# Altium PCB PCB1.PcbDoc
Units mil, origin at the board's own origin, x right, y up, seen from the top; angles counter-clockwise.
Board outline 2385 x 2130 mil, 2 copper layers (Top Layer, Bottom Layer); 41 components, 32 nets, 169 pads, 31 vias.
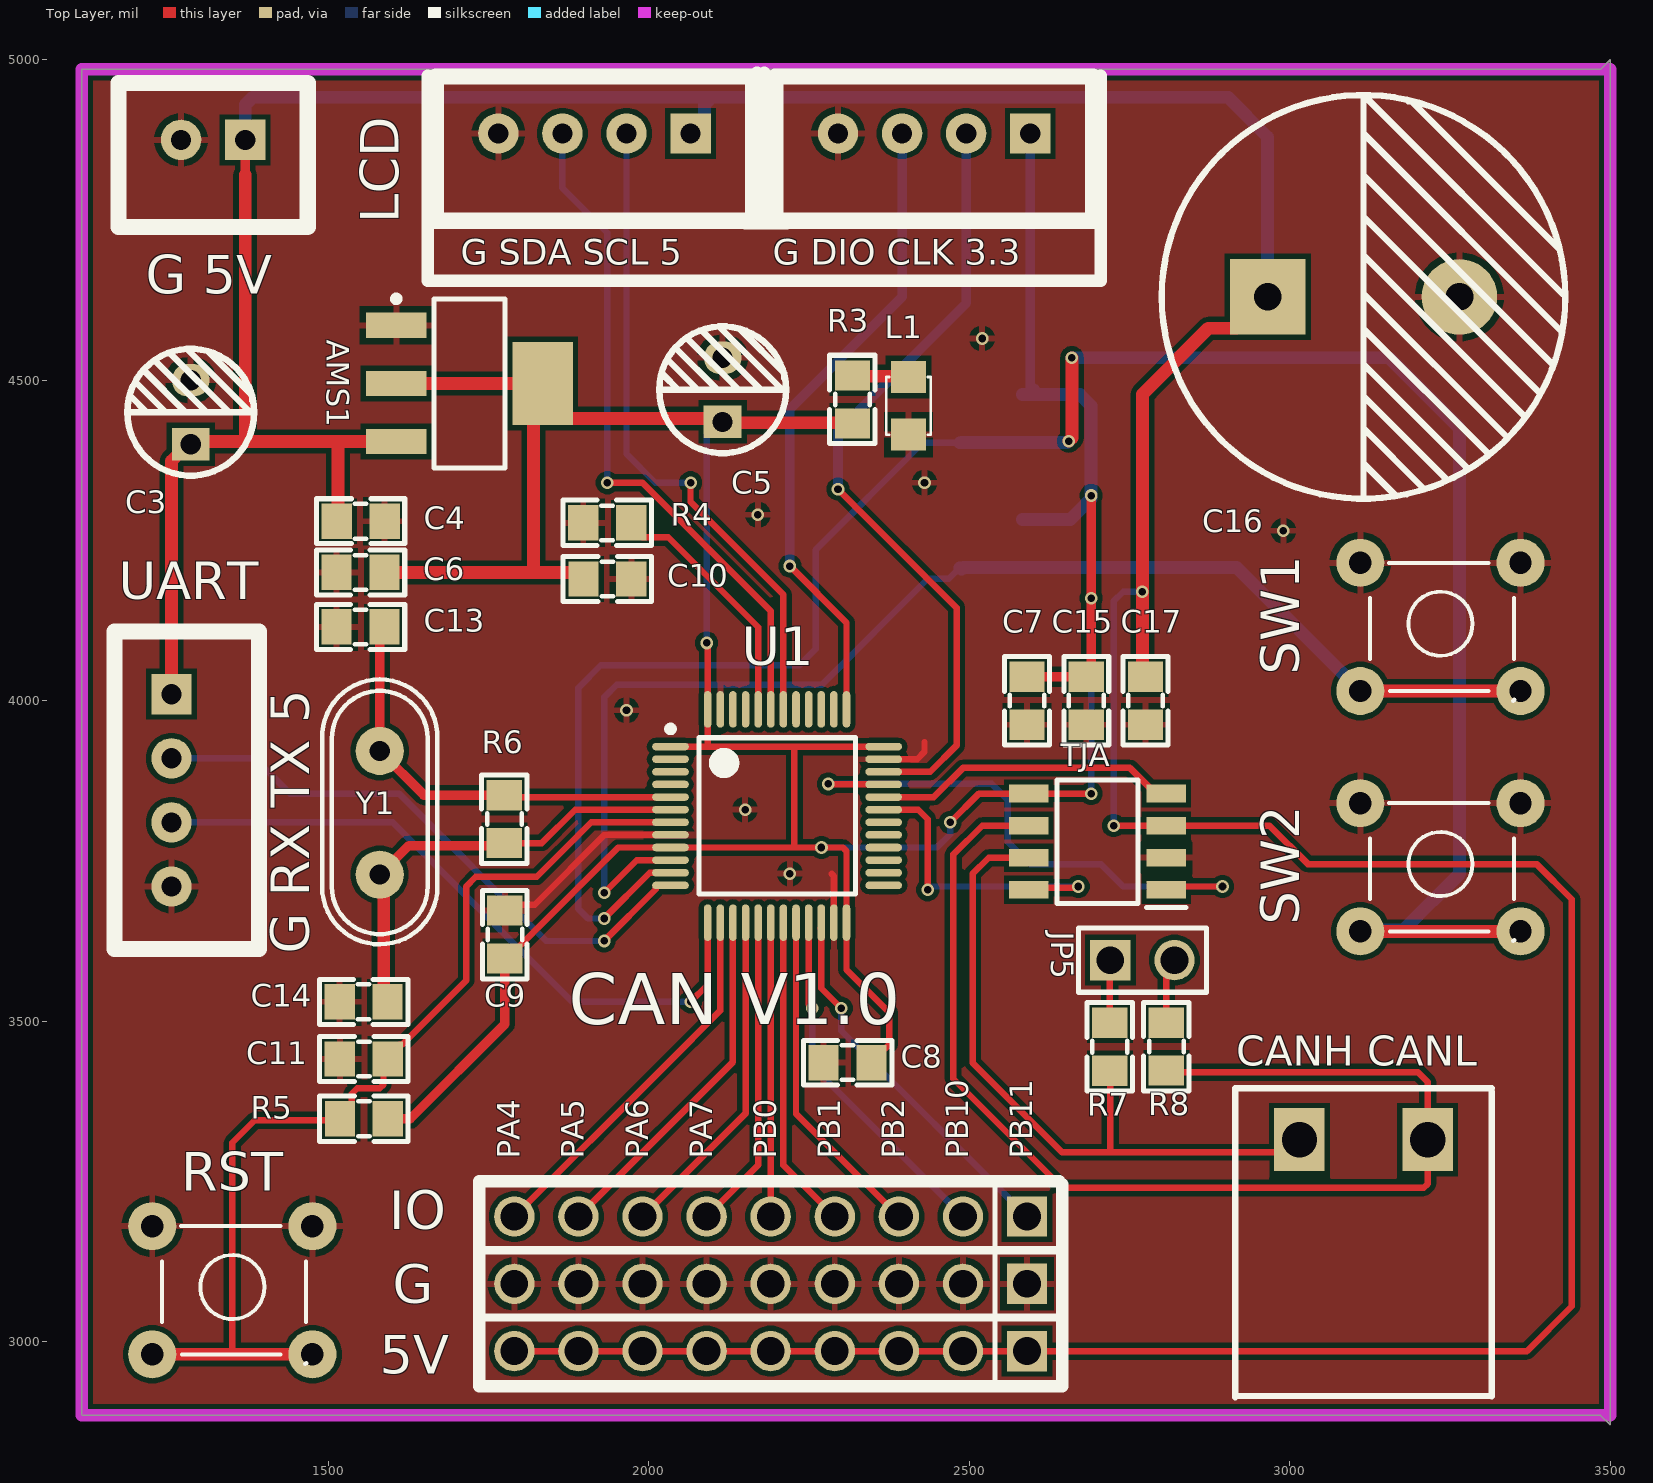
[diagram p0: Top Layer view]
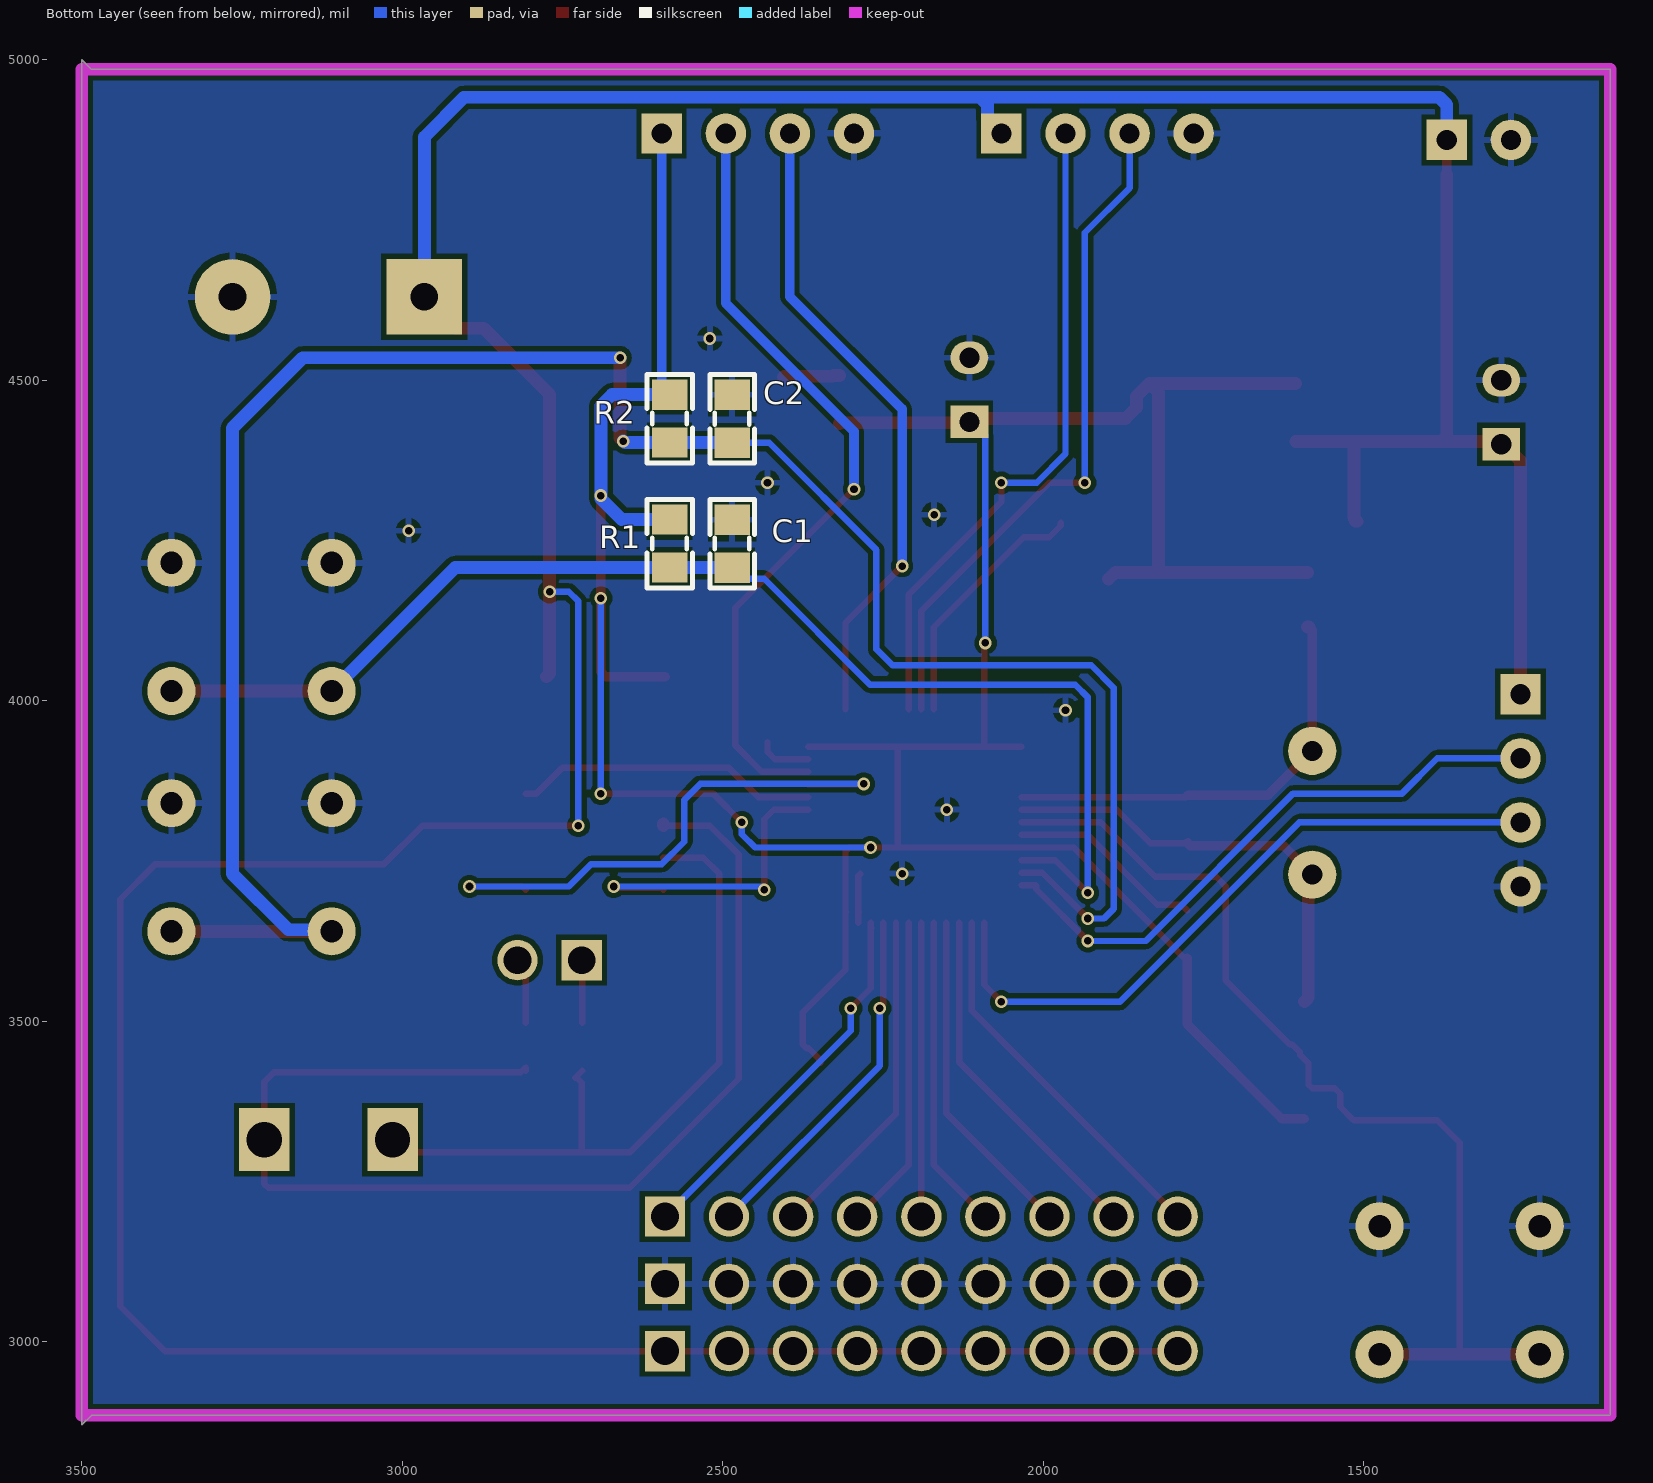
[diagram p1: Bottom Layer view, seen from below]

## Layer stack, top to bottom
Top Solder: solder mask 0.4, Solder Resist, Dk 3.5
Top Layer: signal copper 1.4
Dielectric 1: dielectric 12.6, FR-4, Dk 4.8
Bottom Layer: signal copper 1.4
Bottom Solder: solder mask 0.4, Solder Resist, Dk 3.5

## Board outline
1115,2885 3485,2885 3500,2870 3500,5000 3485,4985 1115,4985

## Design rules (kind name [scope] priority, off if disabled: settings)
Clearance [All] p1: gap=7.87 ignorepadtopadclearanceinfootprint=FALSE
PolygonConnect [All] p1: connectstyle=Relief reliefconductorwidth=10 reliefentries=4 polygonreliefangle="90 Angle" airgapwidth=10
RoutingVias [All] p1: holewidth=11.81 width=19.68 viastyle="Through Hole" minholewidth=11.81 minwidth=19.68 maxholewidth=11.81 maxwidth=19.68
SolderMaskExpansion [All] p1: expansion=4 istentingtop=FALSE
Width [All] p1: maxlimit=20 minlimit=10 preferedwidth=15
30 further rules are at their usual default settings.

## Components (designator, comment, footprint, x,y, rotation, side; value= is the part's Value field where it differs from the comment)
5V "JP 1x9 2.54" "JP 1x9 DT" 2590,2985 r180 top (schematic designator JP3)
AMS1 "AMS1117-3.3V" SOT223 1720,4495 r270 top value="AMS1117-3.3V SOT223"
C1 "104" "tu 0805" 2485,4245 r270 bottom
C2 "104" "tu 0805" 2485,4440 r270 bottom
C3 "100uF" "tu hoa 5mm" 1285,4450 r90 top
C4 "104" "tu 0805" 1550,4280 r0 top
C5 "100uF" "tu hoa 5mm" 2115,4485 r90 top
C6 "104" "tu 0805" 1550,4200 r180 top
C7 "104" "tu 0805" 2590,4000 r270 top
C8 "104" "tu 0805" 2310,3435 r180 top
C9 "104" "tu 0805" 1775,3635 r90 top
C10 "104" "tu 0805" 1935,4190 r0 top
C11 "104" "tu 0805" 1555,3441 r0 top
C13 "20pF" "tu 0805" 1550,4115 r180 top
C14 "20pF" "tu 0805" 1555,3530 r180 top
C15 "104" "tu 0805" 2682.5,4000 r270 top
C16 "220uF" "tu hoa 16mm" 3115,4630 r180 top
C17 "104" "tu 0805" 2775,4000 r270 top
"CANH CANL" "CON 2 EDG5.08" "CON 2 2EDG5.08" 3215,3315 r180 top (schematic designator P1)
G "JP 1x9 2.54" "JP 1x9 DT" 2590,3090 r180 top (schematic designator JP2)
"G 5V" "Header 2P 2.54 Duc Thang" XH2.54M-2 1370,4875 r180 top (schematic designator H1)
"G DIO CLK 3.3" "Header 4P 2.54 Duc Thang" XH2.54M-4 2595,4885 r180 top (schematic designator H3)
"G SDA SCL 5" "Header 4P 2.54 Duc Thang" XH2.54M-4 2065,4885 r180 top (schematic designator H2)
IO "JP 1x9 2.54" "JP 1x9 DT" 2590,3195 r180 top (schematic designator JP1)
JP5 "JP 1x2 2.54" "JP 1x2 DT" 2720,3595 r0 top
L1 "LED 0805" LED-0805-Red 2405,4505 r270 top
R1 "10k" "tro smd 0805" 2585,4244.9 r90 bottom
R2 "10k" "tro smd 0805" 2585,4439.9 r90 bottom
R3 "330" "tro smd 0805" 2320,4470 r270 top
R4 "10k" "tro smd 0805" 1935.1,4275 r180 top
R5 "10k" "tro smd 0805" 1555.1,3350 r0 top
R6 "1M" "tro smd 0805" 1772,3815 r90 top
R7 "60" "tro smd 0805" 2721.5,3460.1 r270 top
R8 "60" "tro smd 0805" 2805,3460 r90 top
RST "SW" SW2-DIP 1225,3180 r0 top value="Button chip 4 pin" (schematic designator SW3)
SW1 "SW" SW2-DIP 3110,4215 r0 top value="Button chip 4 pin"
SW2 "SW" SW2-DIP 3110,3840 r0 top value="Button chip 4 pin"
TJA "TJA1051T_3_118" SOIC127P600X175-8N 2700,3780 r180 top (schematic designator B1)
U1 "STM32F103xx_LQFP48" STM32_LQPF48 2200,3820 r0 top
UART "Header 4P 2.54 Duc Thang" XH2.54M-4 1255,4010 r270 top (schematic designator H4)
Y1 "16Mhz" "Thach Anh 2 chan cam" 1580,3825 r270 top value=4Mhz

## Footprints (in the part's own frame and the unit in brackets; to place one, negate y for a bottom-side part, rotate by r counter-clockwise, add the part's x,y. Pads: shape width x height; smd on the part's side, far side on the other; paste and mask are expansions set on the pad)
"CON 2 2EDG5.08" [mm]
  rect 2x2.5 hole 1.4: 1(0,0) 2(5.08,0)
  silkscreen extent -2.54,-2.03 7.62,10.21, body extent -2.5,-1.75 7.58,10.25, height 3.15
"JP 1x2 DT" [mm] "2 pins, 1 row, straight, gold plating"
  rect 1.6x1.6 hole 1.1: 1(0,0)
  round 1.6 hole 1.1: 2(2.54,0)
  silkscreen extent -1.27,-1.27 3.81,1.27, body extent -1.27,-1.27 3.81,1.27, height 8.54
"JP 1x9 DT" [mm] "9 pins, 1 row, straight, gold plating"
  rect 1.6x1.6 hole 1.1: 1(0,0)
  round 1.6 hole 1.1: 2(2.54,0) 3(5.08,0) 4(7.62,0) 5(10.16,0) 6(12.7,0) 7(15.24,0) 8(17.78,0) 9(20.32,0)
  silkscreen extent -1.27,-1.27 21.59,1.27, body extent -1.27,-1.27 21.59,1.27, height 8.54
LED-0805-Red [mil]
  rect 50x55 smd: 1(0,0) 2(90,0)
  silkscreen extent 0,-35 90,35, body extent 5,-25 85,25, height 43
SOIC127P600X175-8N [mm]
  rect 1.55x0.7 smd: 1(-2.725,1.905) 2(-2.725,0.635) 3(-2.725,-0.635) 4(-2.725,-1.905) 5(2.725,-1.905) 6(2.725,-0.635) 7(2.725,0.635) 8(2.725,1.905)
  silkscreen extent -3.5,-2.45 1.6,2.61, body extent -3,-2.45 3,2.45, height 1.75
SOT223 [mm]
  rect 1x2.4 smd: 1(-2.3,-2.9) 2(0,-2.9) 3(2.3,-2.9)
  rect 3.3x2.4 smd: 4(0,2.9)
  silkscreen extent -3.47,-3.02 3.35,1.4, body extent -3.25,-3.56 3.25,3.4, height 1.68
STM32_LQPF48 [mm]
  oval 1.45x0.3 smd: 1(-4.225,2.75) 2(-4.225,2.25) 3(-4.225,1.75) 4(-4.225,1.25) 5(-4.225,0.75) 6(-4.225,0.25) 7(-4.225,-0.25) 8(-4.225,-0.75) 9(-4.225,-1.25) 10(-4.225,-1.75) 11(-4.225,-2.25) 12(-4.225,-2.75) 25(4.225,-2.75) 26(4.225,-2.25) 27(4.225,-1.75) 28(4.225,-1.25) 29(4.225,-0.75) 30(4.225,-0.25) 31(4.225,0.25) 32(4.225,0.75) 33(4.225,1.25) 34(4.225,1.75) 35(4.225,2.25) 36(4.225,2.75)
  oval 0.3x1.45 smd: 13(-2.75,-4.225) 14(-2.25,-4.225) 15(-1.75,-4.225) 16(-1.25,-4.225) 17(-0.75,-4.225) 18(-0.25,-4.225) 19(0.25,-4.225) 20(0.75,-4.225) 21(1.25,-4.225) 22(1.75,-4.225) 23(2.25,-4.225) 24(2.75,-4.225) 37(2.75,4.225) 38(2.25,4.225) 39(1.75,4.225) 40(1.25,4.225) 41(0.75,4.225) 42(0.25,4.225) 43(-0.25,4.225) 44(-0.75,4.225) 45(-1.25,4.225) 46(-1.75,4.225) 47(-2.25,4.225) 48(-2.75,4.225)
  silkscreen extent -4.35,-3.1 3.1,3.57, body extent -4.5,-4.5 4.5,4.5, height 1.6
SW2-DIP [mil] "SW button 4pin, 250 x250 mil"
  round 75 hole 35: 1(0,0) 2(0,-200) 3(250,-200) 4(250,0)
  silkscreen extent 15,-215 240,0, body extent -36,-220 276,24, height 276
"Thach Anh 2 chan cam" [mm]
  round 1.905 hole 0.8: 1(-2.45,0) 2(2.45,0)
  silkscreen extent -5.28,-2.29 5.21,2.29, body extent -5.68,-2.36 5.68,2.29, height 3.5
"tro smd 0805" [mm]
  rect 1.2x1.4 smd: 1(-0.946,-0.061) 2(0.954,-0.061)
  silkscreen extent -1.75,-0.97 1.75,0.84, body extent -1.56,-0.76 1.44,0.64, height 0.53
"tu 0805" [mm] "Compoment SMD 80x50mil"
  rect 1.2x1.4 smd: 1(-0.946,-0.003) 2(0.954,-0.003)
  silkscreen extent -1.75,-0.89 1.75,0.89, body extent -1.01,-0.64 1.01,0.63, height 0.61
"tu hoa 5mm" [mm]
  rect 1.3x1.5 hole 0.8: 1(-1.27,0)
  oval 1.3x1.5 hole 0.8: 2(1.27,0)
  silkscreen extent -2.51,-2.51 2.51,2.51, body extent -3.12,-3.18 3.23,3.18, height 14.55
"tu hoa 16mm" [mm]
  rect 3x3 hole 1.1: 1(3.8,0)
  round 3 hole 1.1: 2(-3.8,0)
  silkscreen extent -8,-8 8,8, body extent -8.25,-8.25 8.25,8.25, height 28.91
XH2.54M-2 [mm]
  rect 1.6x1.6 hole 0.8: 1(0,0)
  round 1.6 hole 0.8: 2(2.54,0)
  silkscreen extent -2.48,-2.26 5.02,3.46, body extent -2.48,-2.26 5.02,3.48, height 6.91
XH2.54M-4 [mm]
  rect 1.6x1.6 hole 0.8: 1(0,0)
  round 1.6 hole 0.8: 2(2.54,0) 3(5.08,0) 4(7.62,0)
  silkscreen extent -2.48,-2.26 10.1,3.46, body extent -2.48,-2.26 10.1,3.48, height 6.91

## Part data
5V G IO: library part "JP 1x9 2.54 Duc Thang", "Cắm", Chung_Loai=Cắm, Don_Vi=Con, Ma_Hang=MH000903, Ten_Linh_Kien="Jump Đơn Đực 2.54MM 1x40P Thẳng 11MM"
AMS1: library part "AMS1117 SMD", "Dán", Chung_Loai=Dán, Don_Vi=Con, Ma_Hang=MH000596
C1 C2 C4 C6 C7 C8 C9 C10 C11 C13 C14 C15 C17: library part "Tu 0805 104 50V 10%", "Dán", Chung_Loai=Dán, Don_Vi=Con, Ma_Hang=MH004551, So_Chan=2, Ten_Linh_Kien="Tụ 0805 104-100nF 10% 50V"
C3 C5: library part "Tu Hoa 100uF 16V 5x7", "Cắm", Chung_Loai=Cắm, Don_Vi=Con, Ma_Hang=MH001347, So_Chan=2, Ten_Linh_Kien="Tụ Hóa 100uF 16V 5x7MM"
C16: library part "Tu Hoa 220uF 200V 15x35", "Cắm", Chung_Loai=Cắm, Don_Vi=Con, Ma_Hang=MH004819, So_Chan=2, Ten_Linh_Kien="Tụ Hóa 220uF 200V 15x35MM"
"CANH CANL" "G 5V" "G DIO CLK 3.3" "G SDA SCL 5" UART: "Cắm", Chung_Loai=Cắm, Don_Vi=Con
  "CANH CANL": Ma_Hang=MH000759, Ten_Linh_Kien="CON 2 2EDG5.08-2P 5.08MM ( Xanh Cong)"
  "G 5V": Ma_Hang=MH001283, Ten_Linh_Kien="Header 2P XH2.54-2P Đực Thẳng"
  "G DIO CLK 3.3" "G SDA SCL 5" UART: Ma_Hang=MH001285, Ten_Linh_Kien="Header 4P XH2.54-4P Đực Thẳng"
JP5: library part "JP 1x2 2.54 Duc Thang", "Cắm", Chung_Loai=Cắm, Don_Vi=Con, Ma_Hang=MH000903, Ten_Linh_Kien="Jump Đơn Đực 2.54MM 1x40P Thẳng 11MM"
L1: library part "LED 0805 Do", "Dán", Chung_Loai=Dán, Don_Vi=Con, Ma_Hang=MH000897, Ten_Linh_Kien="LED 0805 Màu Đỏ (Red)"
R1 R2 R3 R4 R5 R6 R7 R8: library part "Tro 0805 1% 18k", "Dán", Chung_Loai=Dán, Don_Vi=Con, Ma_Hang=MH005477, So_Chan=2, Ten_Linh_Kien="Trở 0805 1% 18k"
RST SW1 SW2: library part SW4, "Switch button 4 pin"
TJA: "CAN Interface IC Hi Spd CAN Transcvr 4.5V-5.5V 250ns", Manufacturer_Name=NXP, Manufacturer_Part_Number=TJA1051T/3,118, Mouser Part Number=771-TJA1051T3118, Datasheet Link=http://www.nxp.com/docs/en/data-sheet/TJA1051.pdf, Geometry.Height=1.75mm, Mouser Price/Stock=https://www.mouser.co.uk/ProductDetail/NXP-Semiconductors/TJA1051T-3118?qs=O%2F7ihdSJpebv1PFlp05wnQ%3D%3D
Y1: library part "Thach Anh 2 chan Cam", "Crystal For all Crystal 2pin."
U1: ComponentLink1Description="Manufacturer Link", ComponentLink1URL=www.st.com/stm32, ComponentLink2Description=Datasheet, ComponentLink2URL=http://www.st.com/stonline/products/literature/ds/13587.pdf, DatasheetVersion="rev6, Mar-2008", PackageDescription="48-Pin Low-Profile Quad Flat Pack, 7 x 7 mm Body, 0.5 mm Pitch (LQFP48)", PackageReference=LQFP48, PackageVersion=Mar-2008, Published=30-May-2008, Publisher="Altium Limited"

## Via types
v1: diameter 19.68, hole 11.81, Top Layer to Bottom Layer, 31 vias

## Nets (pads, with @x,y where several pads share a name; then routed paths per layer and width w, separated by ;. In a path a pad name is that pad's centre, name@x,y a point inside that pad or via, vN(x,y) a via of type N, cw(c..) or ccw(c..) an arc to the next point about the centre after c; other vN are vias at no path point)
+3.3: "G DIO CLK 3.3.1" AMS1.2 AMS1.4 C5.1 C6.1 C7.1 C8.1 C9.1 C10.1 C15.1 R1.2 R2.2 R3.2 R5.2 TJA.5 U1.1 U1.9 U1.24 U1.36 U1.48 | length 5691.6
  Top Layer w10: C9.1 1779.07,3597.77 1797.69,3616.39 1952.09,3770.79 U1.9 2226.54,3770.79 ; U1.1 2095,3928.27 ; v1(2090,4090) 2091.73,4088.27 U1.48 2091.73,3931.54 2095,3928.27 ; C8.1 2347.23,3439.07 2365.85,3457.69 2369.14,3457.69 2375,3463.55 2375,3513.46 2308.27,3580.2 U1.24 2308.27,3669.16 2307.43,3670 2308.27,3670.84 2308.27,3765 2302.48,3770.79 v1(2269.21,3770.79) 2226.54,3770.79 ; U1.36 2226.54,3928.27 ; v1(2470,3810) 2515,3855 TJA.5 v1(2690,3855) ; 2095,3928.27 2226.54,3928.27 ; 2226.54,3770.79 2226.54,3928.27
  Top Layer w15: R5.2 1627.61,3347.61 1775.13,3495.13 C9.1 ; 2575,4865 2595,4885 ; C7.1 C15.1 2690,4044.86 v1(2690,4160) v1(2690,4320)
  Top Layer w20: C6.1 1826.58,4200.13 ; AMS1.2 AMS1.4 ; C10.1 1887.5,4200.13 1826.58,4200.13 ; R3.2 2316.32,4433.71 2116.29,4433.71 C5.1 2109.96,4440.04 1871.42,4440.04 1854.17,4457.28 1854.17,4475 AMS1.4 ; 1826.58,4200.13 1820,4206.72 1820,4480.83 AMS1.4
  Bottom Layer w10: v1(2090,4090) 2090,4405 2090.47,4405.47 2090.47,4414.41 2106.06,4430 2115,4430 C5.1 ; v1(2269.21,3770.79) 2449.21,3770.79 2470,3791.57 v1(2470,3810) ; v1(2690,3855) v1(2690,4160)
  Bottom Layer w15: R2.2@2590.08,4474.91 2592.64,4477.47 2595,4479.83 2595,4885
  Bottom Layer w20: R1.2 2657.47,4282.47 2690,4315 v1(2690,4320) 2690,4460 2672.53,4477.47 R2.2@2600.17,4477.47 ; R2.2 2592.64,4477.47 R2.2@2600.17,4477.47 ; R2.2@2595,4479.83 2600.17,4485 R2.2@2600.17,4477.47
+5: 5V.1 5V.2 5V.3 5V.4 5V.5 5V.6 5V.7 5V.8 5V.9 "G 5V.1" "G SDA SCL 5.1" AMS1.3 C3.1 C4.1 C16.1 C17.1 TJA.3 UART.1 | length 7522.4
  Top Layer w10: 5V.9 5V.8 5V.7 5V.6 5V.5 5V.4 5V.3 5V.2 5V.1 3370,2985 3440,3055 3440,3690 3385,3745 3028.26,3745 2968.26,3805 TJA.3 v1(2725,3805)
  Top Layer w15: 1370,4820 1370,4875
  Top Layer w20: UART.1 1255,4373.94 1281.06,4400 C3.1 1289.45,4404.45 1370,4404.45 1378.84,4404.45 ; 1370,4820 1370,4413.28 1373.28,4410 1378.84,4404.45 ; C4.1 1510.13,4279.87 1515,4284.73 1515,4404.45 ; AMS1.3 1515,4404.45 ; C17.1 2770,4042.09 v1(2770,4170) 2770,4478.15 2781.72,4489.87 2872.79,4580.94 2916.34,4580.94 2955,4619.61 2955,4630 C16.1 ; 1378.84,4404.45 1515,4404.45
  Bottom Layer w10: v1(2725,3805) 2725,4155 2740,4170 v1(2770,4170)
  Bottom Layer w20: 1370,4875 1370,4929.78 1381.72,4941.5 2098.21,4941.5 ; 2065,4885 2065,4895 2075,4895 2086.5,4906.5 2086.5,4929.78 2098.21,4941.5 ; C16.1 2965.39,4879.61 2903.5,4941.5 2098.21,4941.5
BT1: C1.2 R1.1 SW1.2 SW1.3 U1.10 | length 2032.6
  Top Layer w10: v1@1930.07,3700.07 1981.1,3751.1 U1.10
  Top Layer w20: SW1.2@3105,4010 SW1.2 SW1.3
  Bottom Layer w10: v1(1930,3700) 1930,4005 1950,4025 2270,4025 2435.08,4190.08 2467.79,4190.08 C1.2
  Bottom Layer w20: C1.2 2487.56,4205 2490.11,4207.55 2582.48,4207.55 R1.1 2917.33,4207.67 SW1.2
BT2: C2.2 R2.1 SW2.2 SW2.3 U1.11 | length 3464.6
  Top Layer w10: v1(1930,3660) 2001.42,3731.42 U1.11
  Top Layer w20: v1(2655,4405) 2660,4410 v1(2660,4535) ; SW2.2 SW2.3
  Bottom Layer w10: v1(1930,3660) 1905,3660 1890,3675 1890,4020 1925,4055 2235,4055 2260,4080 2260,4235 2427.43,4402.43 C2.2
  Bottom Layer w20: C2.2 2487.57,4402.43 2487.7,4402.55 2652.55,4402.55 v1(2655,4405) ; v1(2660,4535) 3155,4535 3265,4425 3265,3730 3177.5,3642.5 3112.5,3642.5 3110,3645 SW2.2
CAN_H: JP5.1 R7.1 | length 101.4
  Top Layer w10: JP5.1@2710,3595 2719.11,3585.89 R7.1
CAN_L: JP5.2 R8.2 | length 102.6
  Top Layer w10: R8.2 2807.39,3568.05 2820,3580.66 JP5.2
CAN_RX: TJA.4 U1.32 | length 476.3
  Top Layer w10: U1.32 2444.53,3849.53 2490,3895 2750.55,3895 2790.55,3855 TJA.4
CAN_TX: TJA.1 U1.33 | length 895.5
  Top Layer w10: v1@2280,3869.21 U1.33 ; TJA.1 2812.28,3710 v1(2895,3710)
  Bottom Layer w10: v1(2280,3870) 2535,3870 2560,3845 2560,3780 2595,3745 2705,3745 2740,3710 v1(2895,3710)
CANH: "CANH CANL.2" R7.2 TJA.7 | length 1109.2
  Top Layer w10: TJA.7 2530,3755 2505,3730 2505,3435 2645,3295 2720,3295 ; R7.2 2730,3411.63 2727.73,3411.63 2720,3403.91 2720,3295 ; 3016.65,3316.65 2995,3295 2720,3295
CANL: "CANH CANL.1" R8.1 TJA.6 | length 1883.4
  Top Layer w10: TJA.6@2592.72,3807.28 2590.43,3805 2520,3805 2475,3760 2475,3410 2645,3240 3209.14,3240 3215,3245.86 3215,3315 3215,3405 3200,3420 2815,3420 2807.39,3427.61 R8.1
  Top Layer w20: TJA.6 TJA.6@2592.72,3807.28
GND: "G 5V.2" "G DIO CLK 3.3.4" "G SDA SCL 5.4" AMS1.1 C1.1 C2.1 C3.2 C4.2 C5.2 C6.2 C7.2 C8.2 C9.2 C10.2 C11.1 C13.2 C14.2 C15.2 C16.2 C17.2 G.1 G.2 G.3 G.4 G.5 G.6 G.7 G.8 G.9 L1.2 R4.2 RST.1 RST.4 SW1.1 SW1.4 SW2.1 SW2.4 TJA.2 U1.8 U1.23 U1.35 U1.47 UART.4 | length 469.3
  Top Layer w10: C9.2 1784.18,3681.62 1821.62,3681.62 1930.47,3790.47 U1.8 ; 2285,3730 2288.58,3726.42 2288.58,3670.84 2287.75,3670 2288.58,3669.16 U1.23 ; U1.35 2418.58,3908.58 2430,3920 2430,3935
  other v1: 2220,3730 2150,3830 1965,3985 2990,4265 2170,4290 2430,4340 2520,4565
I2C1_SCL: "G SDA SCL 5.2" U1.42 | length 1032.4
  Top Layer w10: v1(2065,4340) 2064.84,4339.84 2064.84,4310.16 2209.84,4165.16 U1.42
  Bottom Layer w10: 1965,4885 1965,4385 2010,4340 v1(2065,4340)
I2C1_SDA: "G SDA SCL 5.3" U1.43 | length 1065.6
  Top Layer w10: v1(1935,4340) 1990,4340 2190.16,4139.84 U1.43
  Bottom Layer w10: 1865,4885 1865,4800 1935,4730 v1(1935,4340)
NetH3_2: "G DIO CLK 3.3.2" U1.34 | length 1245.2
  Top Layer w10: v1(2295,4330) 2480,4145 2480,3930 2438.9,3888.9 U1.34
  Bottom Layer w15: v1(2295,4330) 2295,4420 2495,4620 2495,4885
NetH3_3: "G DIO CLK 3.3.3" U1.37 | length 1016
  Top Layer w10: v1(2220,4210) 2308.27,4121.73 U1.37
  Bottom Layer w10: 2385,4875 2395,4885
  Bottom Layer w15: v1(2220,4210) 2220,4455 2395,4630 2395,4865 2385,4875
NetJP1_1: IO.1 U1.22 | length 592.4
  Top Layer w10: U1.22 2268.9,3645.84 2268.06,3645 2268.9,3644.16 2268.9,3551.1 v1(2300,3520)
  Bottom Layer w10: v1(2300,3520) 2300,3485 IO.1
NetJP1_2: IO.2 U1.21 | length 558.4
  Top Layer w10: U1.21 2249.21,3525.79 v1(2255,3520)
  Bottom Layer w10: v1(2255,3520) 2255,3430 IO.2
NetJP1_3: IO.3 U1.20 | length 525.1
  Top Layer w10: U1.20 2229.53,3355.47 IO.3
NetJP1_4: IO.4 U1.19 | length 491.9
  Top Layer w10: U1.19 2209.84,3275.16 IO.4
NetJP1_5: IO.5 U1.18 | length 458.7
  Top Layer w10: IO.5 2190,3210 2190.08,3210.08 2190.08,3653.58 U1.18
NetJP1_6: IO.6 U1.17 | length 492
  Top Layer w10: IO.6 2170.47,3275.47 U1.17
NetJP1_7: IO.7 U1.16 | length 525.3
  Top Layer w10: IO.7 2150.79,3355.79 U1.16
NetJP1_8: IO.8 U1.15 | length 558.5
  Top Layer w10: IO.8 2131.1,3436.1 U1.15
NetJP1_9: IO.9 U1.14 | length 591.8
  Top Layer w10: IO.9 2025,3430 2111.42,3516.42 U1.14
NetL1_1: L1.1 R3.1 | length 88.3
  Top Layer w20: R3.1 2327.23,4507.23 2328.34,4506.11 2403.89,4506.11 L1.1
NetR4_1: R4.1 U1.44 | length 396.6
  Top Layer w10: R4.1 1972.33,4272.67 1990.17,4254.83 2030.17,4254.83 2170.47,4114.53 U1.44
OSC_IN: C13.1 R6.2 U1.5 Y1.1 | length 695.1
  Top Layer w10: R6.2 1777.44,3849.53 U1.5
  Top Layer w15: Y1.1@1566.46,3921.46 Y1.1 ; C13.1@1584.87,4115.13 1580,4110.27 Y1.1 ; R6.2 1648.88,3852.57 Y1.1
  Top Layer w20: C13.1@1584.87,4115.13 C13.1
OSC_OUT: C14.1 R6.1 U1.6 Y1.2 | length 699.1
  Top Layer w10: R6.1 1832.77,3777.77 1884.84,3829.84 U1.6
  Top Layer w15: Y1.2 1625,3773.54 1770.17,3773.54 R6.1
  Top Layer w20: Y1.2 1586.11,3722.43 1586.11,3536.25 C14.1
RST: C11.2 R5.1 RST.2 RST.3 U1.7 | length 1590.5
  Top Layer w10: 1350,2980 1350,3310 1385,3345 1515.27,3345 R5.1 1536.5,3366.23 1536.5,3386.5 1545,3395 1580,3395 1585.86,3400.86 1585.86,3434.15 1599.11,3447.41 1599.11,3451.34 1611.2,3463.43 1615.13,3463.43 1715,3563.29 1715,3710 1730,3725 1825,3725 1910.16,3810.16 U1.7
  Top Layer w20: RST.2 1350,2980 RST.3
S: TJA.8 U1.31 | length 504.2
  Top Layer w10: U1.31 2420.16,3829.84 2435,3815 v1(2435,3705) ; TJA.8 2595.86,3708.15 2668.15,3708.15 v1(2670,3710)
  Bottom Layer w10: v1(2435,3705) 2435,3710 v1(2670,3710)
UART_RX: U1.13 UART.3 | length 1060.7
  Top Layer w10: v1(2065,3530) 2091.73,3556.73 U1.13
  Bottom Layer w10: UART.3 1600,3810 1880,3530 v1(2065,3530)
UART_TX: U1.12 UART.2 | length 935.7
  Top Layer w10: v1(1930,3625) 2010.68,3705.68 2010.68,3710.9 2011.51,3711.73 U1.12
  Bottom Layer w10: UART.2 1385,3910 1440,3855 1610,3855 1840,3625 v1(1930,3625)
pads on no net: U1.2 U1.3 U1.4 U1.25 U1.26 U1.27 U1.28 U1.29 U1.30 U1.38 U1.39 U1.40 U1.41 U1.45 U1.46

## Polygon pours and split planes (outlines as drawn)
GND on Bottom Layer "GND_L02_P000" (solid, pour order 0): 1110,4990 1100,4980 1100,2885 1105,2880 3500,2880 3500,5000 3490,4990
GND on Top Layer "GND_L01_P001" (solid, pour order 1): 1120,4980 1120,2890 3500,2890 3495,2895 3495,4980

## Keep-outs
Keep-Out Layer:
  lines w19.68: 1115,2885 3500,2885 3500,4985 1115,4985 1115,2885

## Silkscreen, mask and mechanical layers (free items; w line width, h text height)
Top Overlay:
  lines w19.68: 1655,4975 1655,4655 2705,4655 2705,4975 ; 2168.66,4980 2162.64,4973.98 2162.64,4757.64 2150,4745 2215,4745 ; 2176.22,4748.78 2180,4745 2180,4980 ; 1735,2930 1735,3250 2640,3250 2645,3245 2645,2930 1735,2930
  text "LCD" at 1610,4745 h60 r90
  text "G RX TX 5" at 1470,3605 h60 r90
  text "CAN V1.0" at 1875,3495 h80
  text "PA4" at 1810,3285 h60 r90
  text "PA5" at 1910.21,3285 h60 r90
  text "PA6" at 2010.58,3285 h60 r90
  text "PA7" at 2110.12,3285 h60 r90
  text "PB0" at 2210.5,3285 h60 r90
  text "PB1" at 2310.21,3285 h60 r90
  text "PB2" at 2409.92,3285 h60 r90
  text "PB10" at 2510.29,3285 h60 r90
  text "PB11" at 2610,3285 h60 r90